# Altium PCB 4.PcbDoc
Units mm, origin at the board's own origin, x right, y up, seen from the top; angles counter-clockwise.
Board outline 43 x 38 mm, 2 copper layers (Top Layer, Bottom Layer); 18 components, 18 nets, 58 pads, 2 vias.
Unrouted connection lines stored in the file: 1.
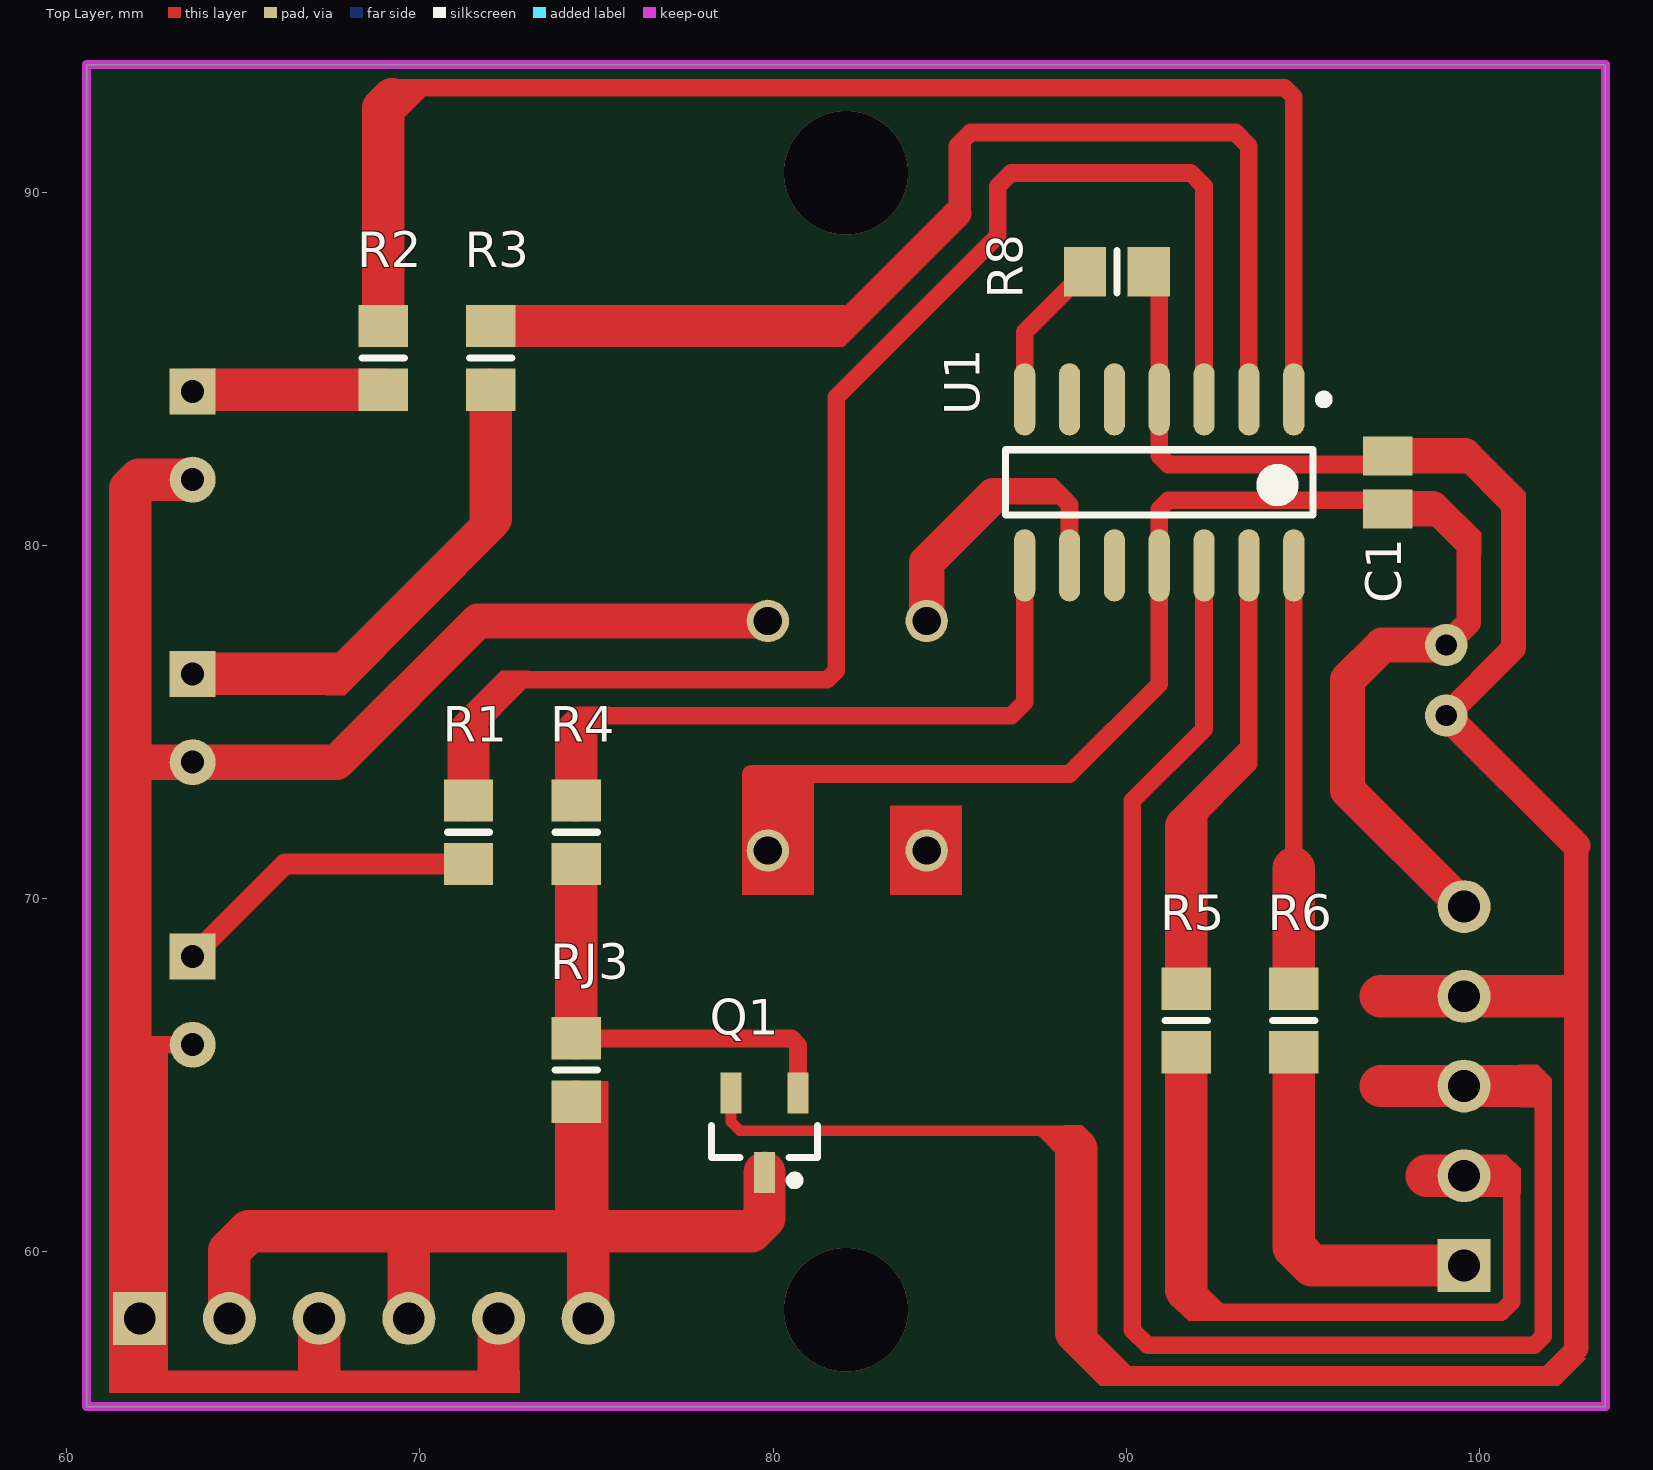
[diagram p0: Top Layer view]
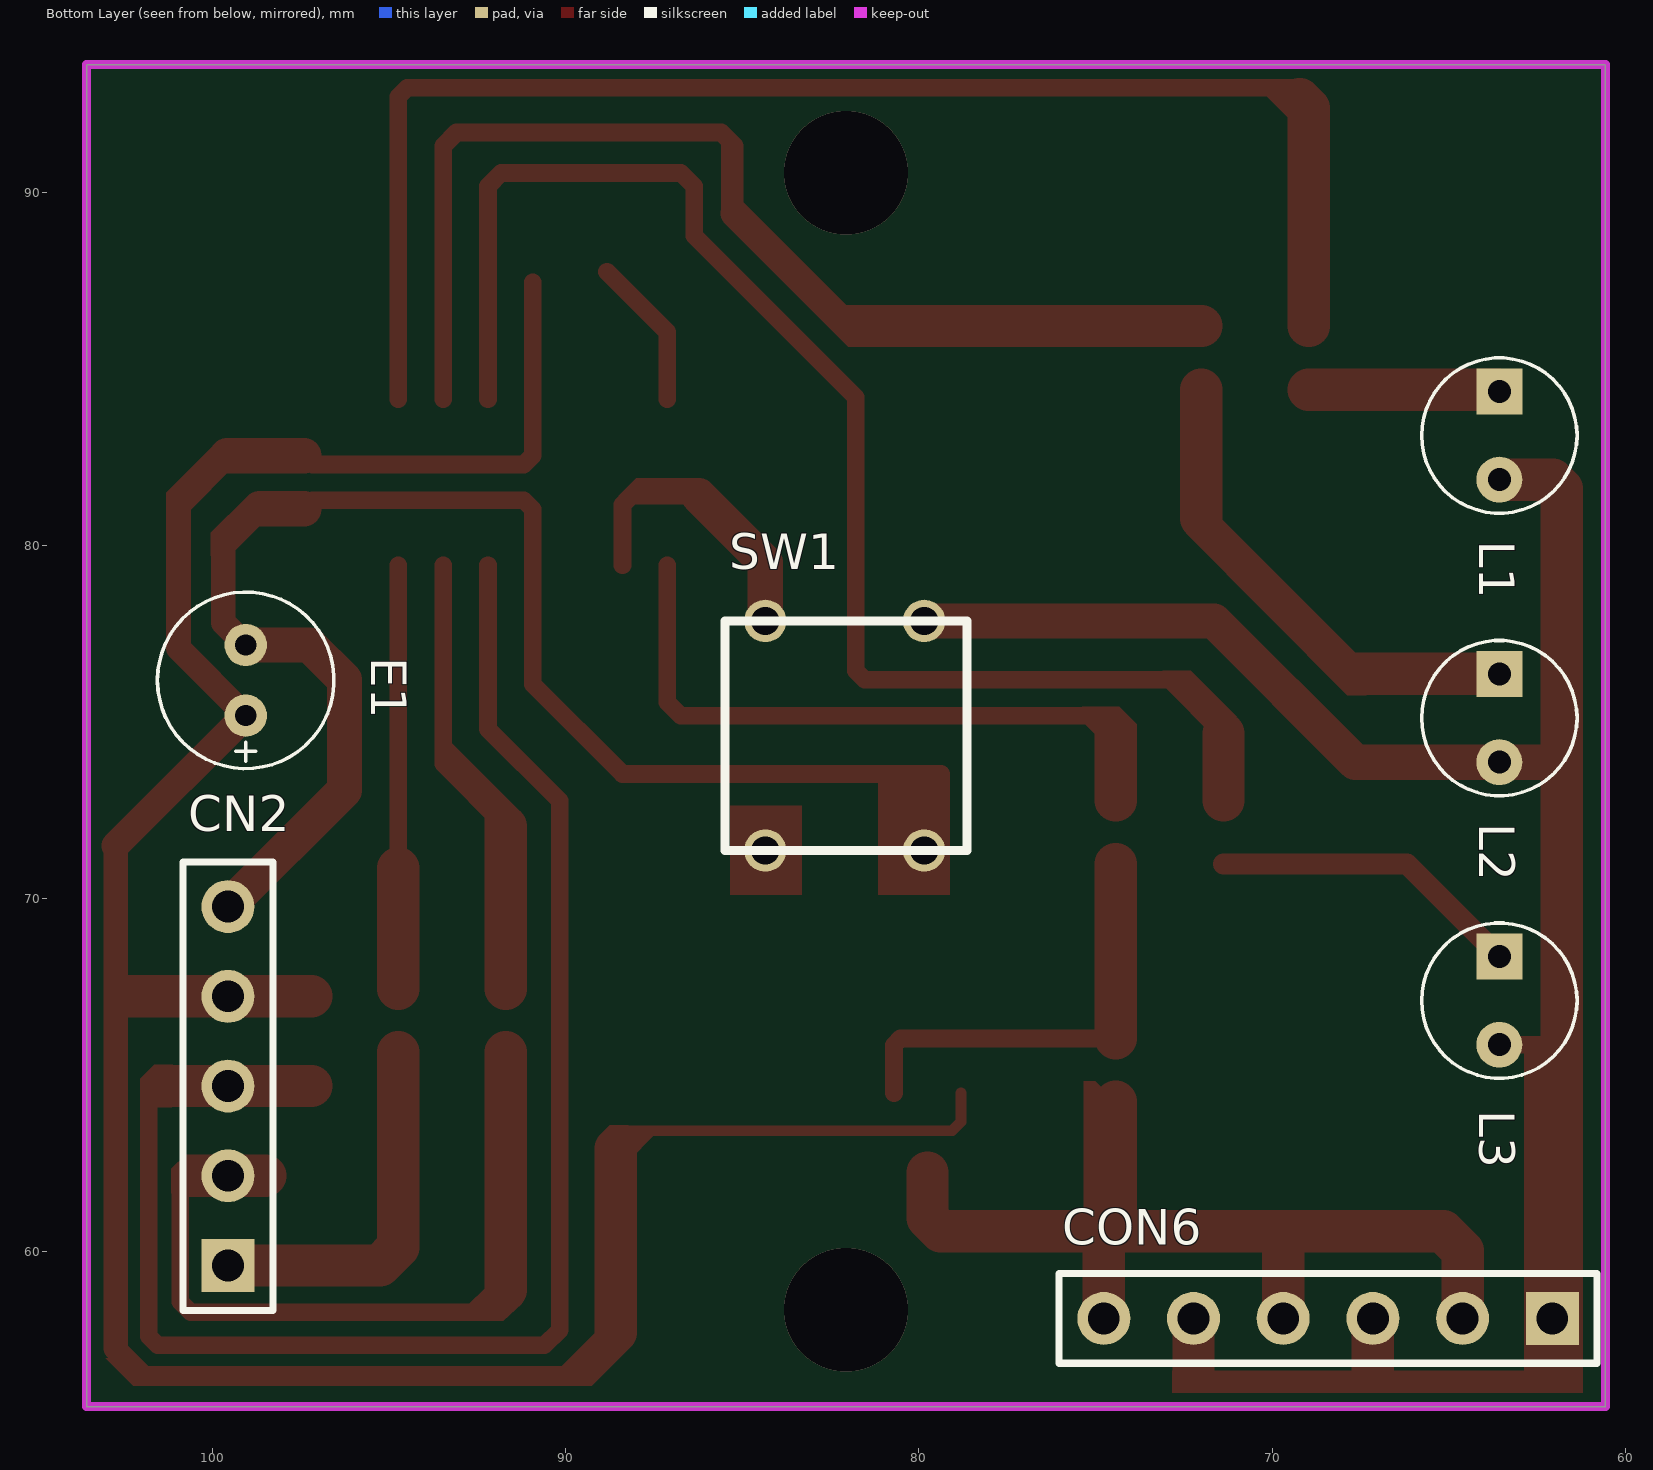
[diagram p1: Bottom Layer view, seen from below]

## Layer stack, top to bottom
Top Layer: signal copper 0.0356
Dielectric: dielectric 0.32, FR-4, Dk 4.8
Bottom Layer: signal copper 0.0356

## Board outline
60.563,55.615 60.563,93.615 103.563,93.615 103.563,55.615

## Design rules (kind name [scope] priority, off if disabled: settings)
Clearance [All] p1: gap=0.254
HoleSize [All] p1: absolutevalues=TRUE maxlimit=5 minlimit=0.025 maxpercent=80.000 minpercent=20.000
MinimumSolderMaskSliver [All] p1: minsoldermaskwidth=0.2
PolygonConnect [All] p1: connectstyle=Relief reliefconductorwidth=0.254 reliefentries=4 polygonreliefangle="90 Angle"
RoutingVias [All] p1: holewidth=0.711 width=1.27 viastyle="Through Hole" minholewidth=0.711 minwidth=1.27 maxholewidth=0.711 maxwidth=1.27
SilkscreenOverComponentPads [All] p1: minsilkscreentomaskgap=0
SolderMaskExpansion [All] p1: expansion=0.102
Width [All] p1: maxlimit=2 minlimit=0.254 preferedwidth=0.254
25 further rules are at their usual default settings.

## Components (designator, comment, footprint, x,y, rotation, side; value= is the part's Value field where it differs from the comment)
C1 "Cap" C0805 97.409,81.788 r270 top
CN2 "MHDR1X5" HDR1X5 99.563,59.615 r90 bottom
CON6 "MHDR1X6" HDR1X6 62.063,58.115 r0 bottom
E1 "Cap Pol1" CAP 99.06,75.184 r90 bottom
L1 "LED0" LED_DIP 63.563,83.115 r270 bottom
L2 "LED0" LED_DIP 63.563,75.115 r270 bottom
L3 "LED0" LED_DIP 63.563,67.115 r270 bottom
Q1 "2N3906" SOT23_N 79.756,63.373 r270 top
R1 "Res1" 6-0805_N 71.374,71.882 r90 top
R2 "Res1" 6-0805_N 68.961,85.315 r90 top
R3 "Res1" 6-0805_N 72.009,85.315 r90 top
R4 "Res1" 6-0805_N 74.422,71.882 r90 top
R5 "Res1" 6-0805_N 91.694,66.548 r270 top
R6 "Res1" 6-0805_N 94.742,66.548 r90 top
R8 "Res1" 6-0805_N 89.732,87.757 r180 top
RJ3 "Res1" 6-0805_N 74.422,65.151 r90 top
SW1 "SW-PB" SW_DIP 84.349,71.365 r90 bottom
U1 "FM8PB53B" SOP14 90.932,81.788 r270 top

## Footprints (in the part's own frame and the unit in brackets; to place one, negate y for a bottom-side part, rotate by r counter-clockwise, add the part's x,y. Pads: shape width x height; smd on the part's side, far side on the other; paste and mask are expansions set on the pad)
6-0805_N [mm] "Chip Resistor, Body 2.0x1.2mm, IPC Medium Density"
  rect 1.2x1.4 smd: 1(-0.9,0) 2(0.9,0)
  silkscreen extent 0,-0.6 0,0.6, body extent -1.07,-0.7 1.07,0.7, height 0.7
C0805 [mm] "Chip Capacitor, Body 2.0x1.3mm, IPC High Density"
  rect 1.1x1.4 smd: 1(-0.75,0) 2(0.75,0)
  body extent -1.1,-0.72 1.1,0.72, height 1.4
CAP [mm]
  round 1.2 hole 0.6: 1(0,0) 2(2,0)
  silkscreen extent -1.5,-2.5 3.5,2.5
HDR1X5 [mm] "Connector; Header; 5 Position"
  rect 1.5x1.5 hole 0.9: 1(0,0)
  round 1.5 hole 0.9: 2(2.54,0) 3(5.08,0) 4(7.62,0) 5(10.16,0)
  silkscreen extent -1.27,-1.27 11.43,1.27
HDR1X6 [mm] "Connector; Header; 6 Position"
  rect 1.5x1.5 hole 0.9: 1(0,0)
  round 1.5 hole 0.9: 2(2.54,0) 3(5.08,0) 4(7.62,0) 5(10.16,0) 6(12.7,0)
  silkscreen extent -1.27,-1.27 13.97,1.27
LED_DIP [mm]
  rect 1.3x1.3 hole 0.65: 1(-1.25,0)
  round 1.3 hole 0.65: 2(1.25,0)
  silkscreen extent -2.2,-2.2 2.2,2.2
SOP14 [mm]
  oval 2.05x0.6 smd: 1(-2.35,3.81) 2(-2.35,2.54) 3(-2.35,1.27) 4(-2.35,0) 5(-2.35,-1.27) 6(-2.35,-2.54) 7(-2.35,-3.81) 8(2.35,-3.81) 9(2.35,-2.54) 10(2.35,-1.27) 11(2.35,0) 12(2.35,1.27) 13(2.35,2.54) 14(2.35,3.81)
  silkscreen extent -2.47,-4.35 0.92,4.79
SOT23_N [mm] "SOT23, 3-Leads, Body 2.9x1.3mm, Pitch 0.95mm, Lead Span 2.3mm - Reverse Pinning, IPC Medium Density"
  rect 1.15x0.6 smd: 1(1.125,0) 2(-1.125,-0.95) 3(-1.125,0.95)
  silkscreen extent -0.2,-1.5 1.47,1.5, body extent -0.7,-1.5 0.7,1.5, height 1.1
SW_DIP [mm]
  round 1.2 hole 0.8: 1(6.5,0) 2(0,-4.5) 2(6.5,-4.5) ""(0,0)
  silkscreen extent 0,-5.72 6.5,1.14

## Part data
C1: "Capacitor"
CN2: "Header, 5-Pin"
CON6: "Header, 6-Pin"
E1: "Polarized Capacitor (Radial)"
L1 L2 L3: "Typical INFRARED GaAs LED"
Q1: "PNP General Purpose Amplifier"
R1 R2 R3 R4 R5 R6 R8 RJ3: "Resistor"
SW1: "Switch"

## Via types
v1: diameter 3.5, hole 3.5, Top Layer to Bottom Layer, 2 vias

## Nets (pads, with @x,y where several pads share a name; then routed paths per layer and width w, separated by ;. In a path a pad name is that pad's centre, name@x,y a point inside that pad or via, vN(x,y) a via of type N, cw(c..) or ccw(c..) an arc to the next point about the centre after c; other vN are vias at no path point)
GND: C1.2 CN2.5 CON6.1 CON6.3 CON6.5 E1.2 L1.2 L2.2 L3.2 SW1.2 U1.11 | length 93.2
  Top Layer w0.254: 61.389,65.865 61.799,65.865 ; 61.419,73.865 61.799,73.865 ; C1.2@97.167,81.28 C1.2 ; E1.2 E1.2@99.155,77.184
  Top Layer w0.5: 61.799,65.865 L3.2 ; 79.375,73.533 88.392,73.533 90.932,76.073 U1.11 90.932,81.026 91.186,81.28 C1.2@97.167,81.28
  Top Layer w0.7: 98.667,81.038 99.695,80.01 99.695,77.819 E1.2
  Top Layer w1: 61.799,73.865 L2.2 67.642,73.865 71.642,77.865 SW1.2@79.849,77.865 ; C1.2 98.667,81.038 ; E1.2 97.25,77.184 96.266,76.2 96.266,73.072 CN2.5
  Top Layer w1.2: 61.799,56.642 61.799,65.865 61.799,73.865 61.799,81.611 62.053,81.865 L1.2 ; 67.143,56.636 CON6.3 ; 72.223,56.636 CON6.5
NetCN2_1: CN2.1 R6.1 | length 10.6
  Top Layer w1.2: R6.1 94.742,60.133 95.26,59.615 CN2.1
NetCN2_2: CN2.2 R5.2 | length 21.9
  Top Layer w0.5: 91.694,58.928 92.329,58.293 100.618,58.293 100.913,58.588 100.913,61.887 100.645,62.155
  Top Layer w1.2: 91.694,58.928 R5.2 ; 98.505,62.155 CN2.2 100.37,62.155
NetCN2_3: CN2.3 U1.12 | length 45.5
  Top Layer w0.5: U1.12 92.202,74.803 90.17,72.771 90.17,57.785 90.603,57.352 101.548,57.352 101.802,57.606 101.802,64.441 101.6,64.643
  Top Layer w1.2: 97.207,64.695 CN2.3 101.167,64.695
NetCON6_2: CON6.2 CON6.4 CON6.6 Q1.1 RJ3.1 | length 27
  Top Layer w1.2: CON6.2 64.603,60.031 65.151,60.579 79.375,60.579 79.756,60.96 Q1.1 ; CON6.4 69.683,60.539 ; 74.422,60.833 RJ3.1 ; CON6.6 74.763,60.492
NetL1_1: L1.1 R2.1 | length 5.3
  Top Layer w1.2: L1.1@63.613,84.415 R2.1
NetL2_1: L2.1 R3.1 | length 13.9
  Top Layer w0.8: 67.602,76.365 72.009,80.772
  Top Layer w1.2: L2.1 67.602,76.365 ; 72.009,80.772 R3.1
NetL3_1: L3.1 R1.1 | length 8.9
  Top Layer w0.6: L3.1 66.18,70.982 R1.1
NetQ1_3: Q1.3 R4.1 RJ3.2 | length 12.7
  Top Layer w0.254: RJ3.2 RJ3.2@74.433,66.04
  Top Layer w0.5: RJ3.2@74.433,66.04 80.518,66.04 80.706,65.852 Q1.3
  Top Layer w1.2: RJ3.2 R4.1
NetR1_2: R1.2 U1.3 | length 40.8
  Top Layer w0.5: 71.374,74.676 72.898,76.2 81.534,76.2 81.788,76.454 81.788,84.201 86.36,88.773 86.36,90.17 86.741,90.551 91.821,90.551 92.202,90.17 U1.3
  Top Layer w1.2: R1.2 71.374,74.676
NetR2_2: R2.2 U1.1 | length 40.7
  Top Layer w0.5: 69.215,92.964 94.488,92.964 94.742,92.71 U1.1
  Top Layer w1.2: R2.2 68.961,92.38 69.215,92.634
NetR3_2: R3.2 U1.2 | length 32.2
  Top Layer w0.5: 85.217,89.408 85.217,91.313 85.598,91.694 93.091,91.694 93.472,91.313 U1.2
  Top Layer w0.8: 81.407,86.233 82.042,86.233 85.217,89.408
  Top Layer w1.2: R3.2 81.389,86.215
NetR4_2: R4.2 U1.8 | length 18.7
  Top Layer w0.5: 74.422,74.422 75.184,75.184 86.741,75.184 87.122,75.565 U1.8
  Top Layer w1.2: R4.2 74.422,74.422
NetR5_1: R5.1 U1.13 | length 12.7
  Top Layer w0.5: 91.694,72.044 93.472,73.822 U1.13
  Top Layer w1.2: R5.1 91.694,72.044
NetR6_2: R6.2 U1.14 | length 12
  Top Layer w0.5: 94.742,70.866 U1.14
  Top Layer w1.2: R6.2 94.742,70.866
NetR8_2: R8.2 U1.7 | length 4.3
  Top Layer w0.5: U1.7 87.122,86.047 R8.2
NetSW1_1: SW1.1 U1.9 | length 8.3
  Top Layer w0.5: 86.233,81.407 88.138,81.407 88.392,81.153 U1.9
  Top Layer w1: SW1.1 84.349,79.523 86.233,81.407
VCC: C1.1 CN2.4 E1.1 Q1.2 R8.1 U1.4 | length 78
  Top Layer w0.254: C1.1@97.167,82.296 C1.1
  Top Layer w0.3: Q1.2 78.806,63.688 79.06,63.434 88.585,63.434
  Top Layer w0.5: 89.789,56.515 101.981,56.515 ; R8.1@90.932,87.457 U1.4 90.932,82.55 91.186,82.296 C1.1@97.167,82.296
  Top Layer w0.6: 88.585,57.719 89.789,56.515 ; 101.981,56.515 102.743,57.277
  Top Layer w0.7: E1.1 100.965,77.089 100.965,81.153 99.58,82.538 ; 102.743,57.277 102.743,71.501
  Top Layer w0.8: E1.1 102.743,71.501
  Top Layer w1: C1.1 99.58,82.538
  Top Layer w1.2: 88.585,57.719 88.585,62.915 ; 97.207,67.235 CN2.4 102.437,67.235
pads on no net: SW1. U1.5 U1.6 U1.10
copper on no net:
  other v1: 82.063,58.365 82.063,90.551

## Keep-outs
Keep-Out Layer:
  the board outline again, w0.254

## Other copper
Top Layer:
  rectangle net GND: 79.121,70.104 81.153,73.533
  rectangle: 83.312,70.104 85.344,72.644
  rectangle net GND: 62.103,56.515 62.865,65.865
  rectangle net GND: 61.199,56.007 72.825,56.642
  region net NetCN2_2: 101.163,61.655 101.163,62.355 100.763,62.755 100.388,62.755
  region net NetCN2_2: 100.35,61.555 100.75,61.555 100.75,61.755 100.725,61.78
  region net NetSW1_1: 86.25,81.9 88,81.9 88.493,81.407 86.5,81.407
  region net NetR1_2: 71,75.15 72.3,76.45 73.1,76.45 73.15,76.4 71.675,74.925
  region net NetR4_2: 75.022,74.175 75.022,74.85 74.638,74.85 74.622,74.834
  region net NetR4_2: 75.375,75.434 74.325,75.434 73.825,74.934 73.825,74.234
  region net NetR5_1: 92.294,71.775 92.294,72.7 92.169,72.7 91.919,72.45
  region net NetR5_1: 91.325,72.5 93.35,74.525 93.472,74.403 93.472,73.772 92,72.3
  region net NetCN2_3: 101.15,64.095 101.75,64.095 101.75,64.384 101.761,64.395 101.225,64.395
  region net NetCN2_3: 101.127,65.295 101.652,65.295 102.052,64.895 102.052,64.395 101.464,64.395 101.221,64.638
  region net VCC: 99.915,82.9 99.915,82.375 101.315,80.975 101.315,81.5
  region net GND: 99.02,81.388 100.045,80.363 100.045,79.713 99.07,80.688
  region net NetCN2_2: 92.825,58.425 92.2,59.05 91.95,59.05 91.95,58.875 92.325,58.5
  region net NetCN2_2: 91.25,58.525 91.775,58.043 92.572,58.043 92.025,58.59
  region net VCC: 88.25,62.55 87.475,63.325 87.475,63.5 88.1,63.5 88.4,63.2
  region net VCC: 89.05,63.284 88.75,63.584 88.225,63.584
  region net VCC: 89.15,57.725 90.125,56.75 90.125,56.475 89.975,56.475 88.95,57.5
  region net VCC: 89.775,56.215 89.26,56.215 88.175,57.3 88.3,57.425 88.625,57.425
  region net VCC: 103.025,56.99 102.25,56.215 102,56.215 101.981,56.234 102.675,56.928 102.675,56.99
  region net VCC: 89.775,56.215 102,56.215 101.981,56.234 101.981,56.505 89.789,56.505
  region net NetL2_1: 67.325,75.765 67.875,75.765 72.425,80.35 71.8,80.34
  region net NetR2_2: 69.375,91.9 69.375,91.95 70.35,92.925 70.311,92.964 69.215,92.964
  region net NetR3_2: 81.05,86.8 81.05,85.625 82,85.625 83.125,86.775 82.275,86.8
  region net NetR3_2: 85.598,89.281 85.598,91.694 85.217,91.313 85.217,89.789
  region net NetCON6_2: 75.35,60.125 75.325,60.15 75.325,64.825 75,64.825 74.763,64.588 74.763,60.492

## Dimensions
103.563,93.615 to 60.563,55.615 on Keep-Out Layer
60.563,93.615 to 103.563,93.615 on Keep-Out Layer